# Altium PCB PCB1.PcbDoc
Units mm, origin at the board's own origin, x right, y up, seen from the top; angles counter-clockwise.
Board outline 20 x 20 mm, 2 copper layers (Top Layer, Bottom Layer); 37 components, 35 nets, 141 pads, 32 vias.
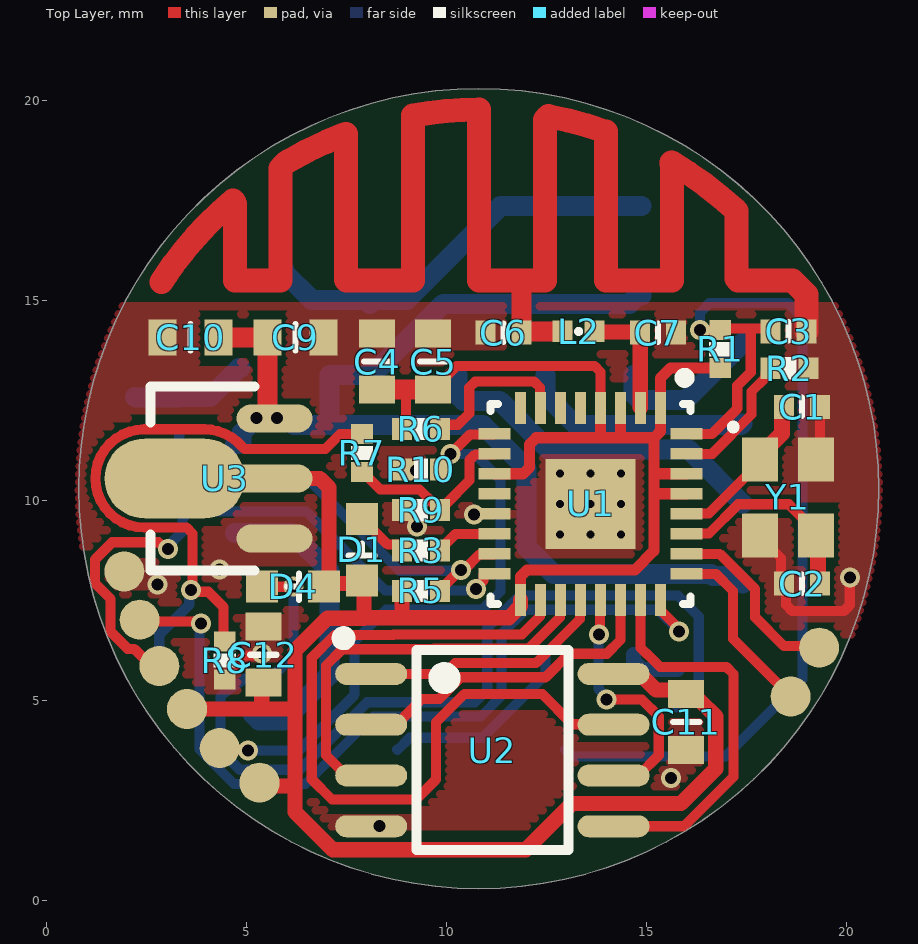
[diagram p0: Top Layer view]
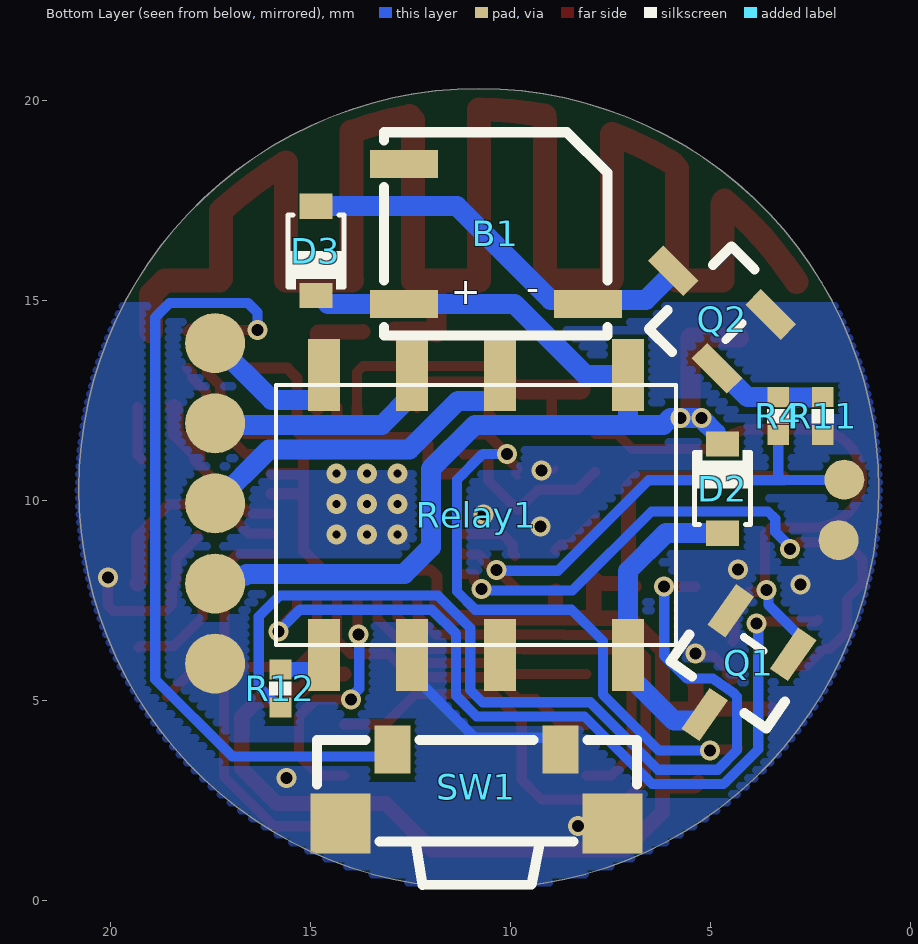
[diagram p1: Bottom Layer view, seen from below]
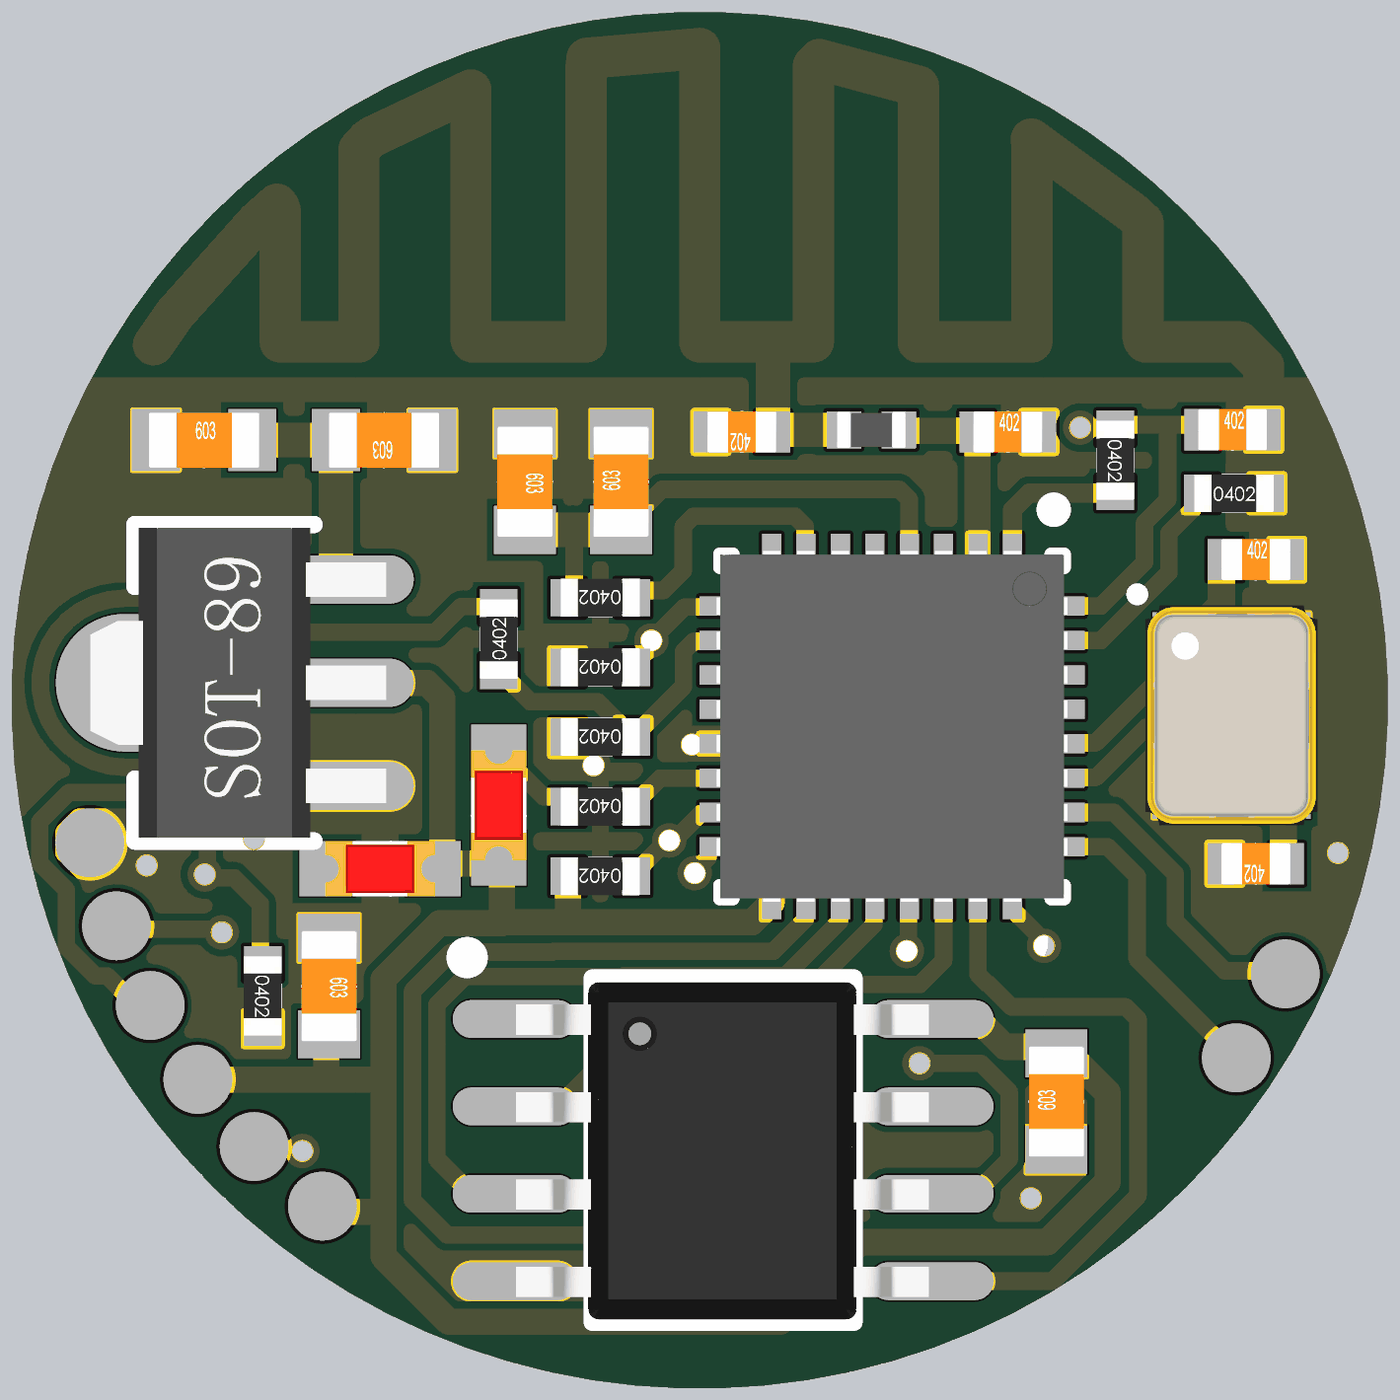
[diagram p2: 3D render of the assembled board from above, using the file's embedded part models]
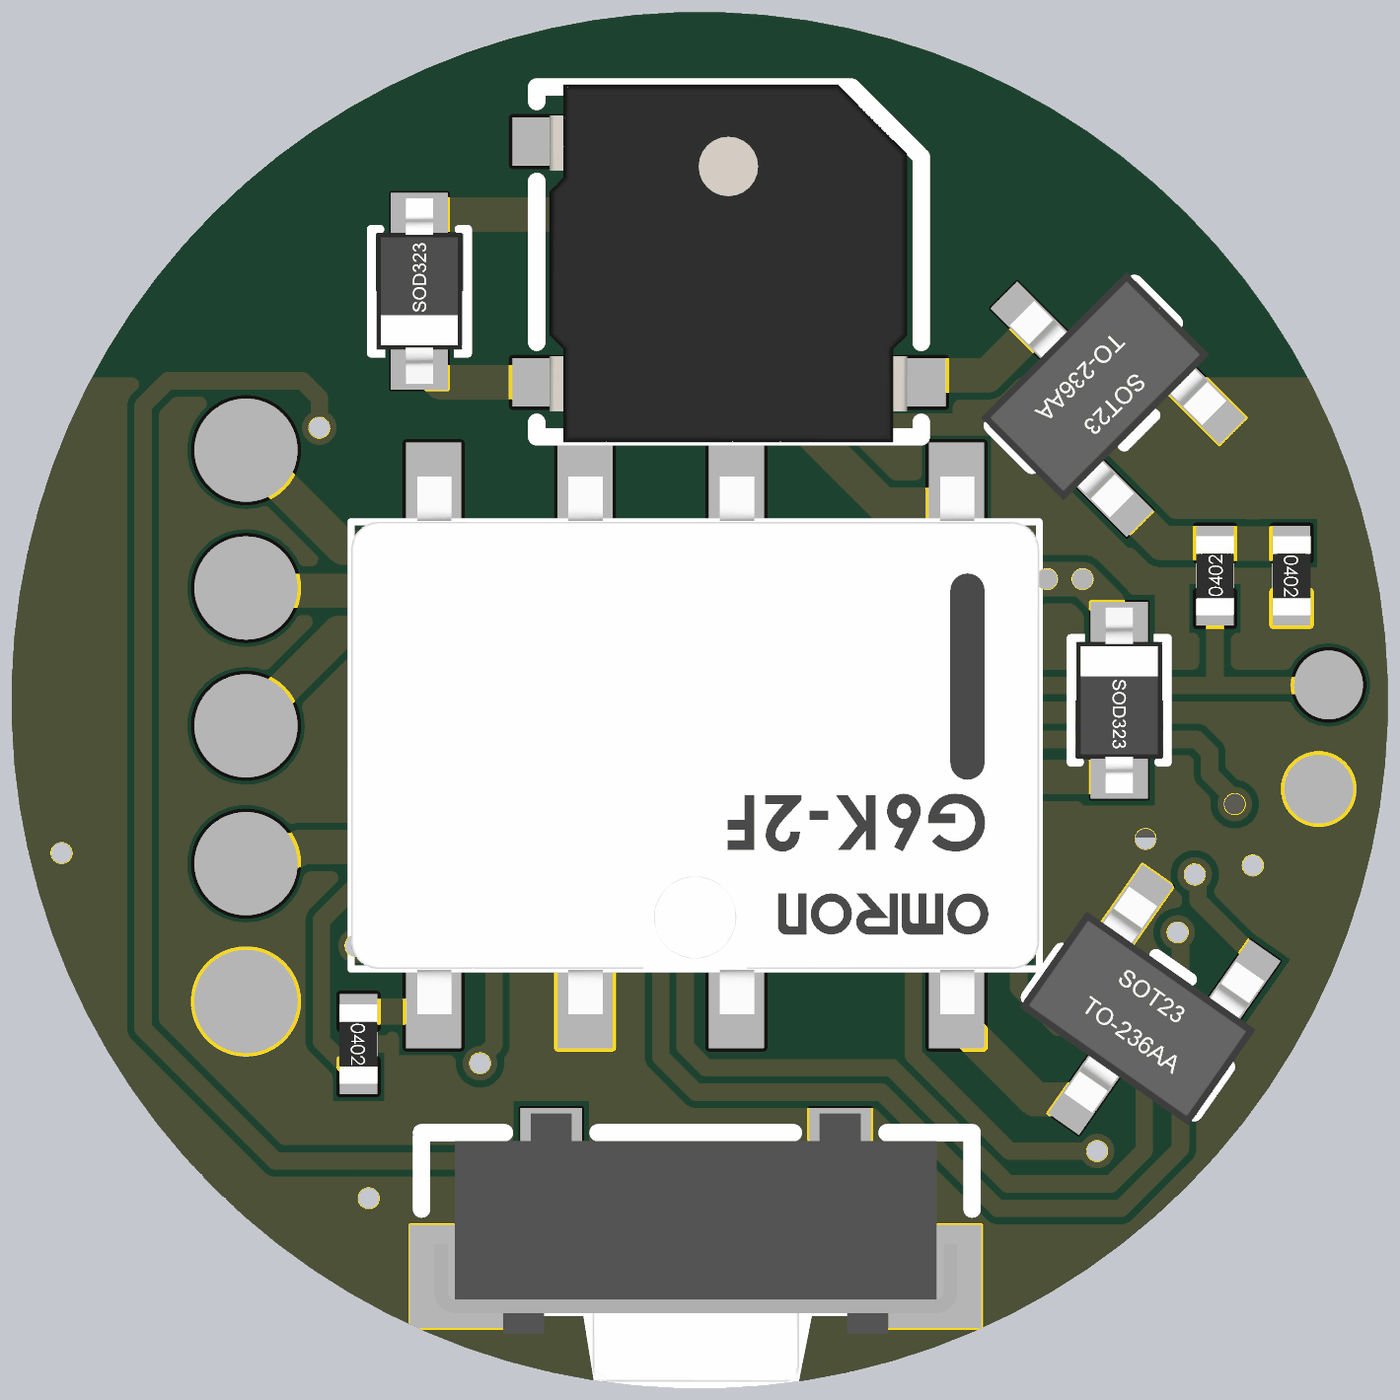
[diagram p3: 3D render of the assembled board from below, using the file's embedded part models]

## Layer stack, top to bottom
Top Solder: solder mask 0.0102, Solder Resist, Dk 3.5
Top Layer: signal copper 0.0356
Dielectric 1: dielectric 0.32, FR-4, Dk 4.8
Bottom Layer: signal copper 0.0356
Bottom Solder: solder mask 0.0102, Solder Resist, Dk 3.5

## Board outline
0.795,10.287 ccw(c10.795,10.287) 10.795,0.287 ccw(c10.795,10.287) 20.795,10.287 ccw(c10.795,10.287) 10.795,20.287 ccw(c10.795,10.287)

## Design rules (kind name [scope] priority, off if disabled: settings)
Clearance [All] p1: gap=0.102 ignorepadtopadclearanceinfootprint=TRUE
ComponentClearance [All] p1: gap=0 collisioncheckmode=3 verticalgap=0 showdistances=FALSE
HoleToHoleClearance [All] p1: gap=0.025 allowstackedmicrovias=TRUE
MinimumSolderMaskSliver [All] p1: minsoldermaskwidth=0.025
PlaneConnect [All] p1: planeconnectstyle=Direct reliefexpansion=0.508 reliefentries=4 reliefconductorwidth=0.254 reliefairgap=0.254
PolygonConnect [All] p1: connectstyle=Direct reliefconductorwidth=0.254 reliefentries=4 polygonreliefangle="90 Angle" airgapwidth=0.254
RoutingVias [All] p1: holewidth=0.711 width=1.27 viastyle="Through Hole" minholewidth=0.711 minwidth=1.27 maxholewidth=0.711 maxwidth=1.27
ShortCircuit [InNet('No Net')] p1: allowed=FALSE
SilkToSilkClearance [All] p1: silktosilkclearance=0.025
SilkToSolderMaskClearance [IsPad] p1: minsilkscreentomaskgap=0.025 clearancetoexposedcopper=TRUE
SolderMaskExpansion [All] p1: expansion=0.025 istentingtop=FALSE
UnConnectedPin [All] p1:
UnRoutedNet [All] p1: checkbadconnections=TRUE
UnpouredPolygon [All] p1: allowunpoured=TRUE
Width [All] p1: maxlimit=1.27 minlimit=0.102 preferedwidth=0.152
21 further rules are at their usual default settings.

## Components (designator, comment, footprint, x,y, rotation, side; value= is the part's Value field where it differs from the comment)
B1 "BEEP" BUZZER-5020 10.369,16.657 r180 bottom
C1 "10pF" 0402C 18.876,12.33 r0 top
C2 "10pF" 0402C 18.876,7.91 r180 top
C3 "1uF" 0402C 18.538,14.217 r0 top
C4 "10uF" 0603C 8.255,13.462 r270 top
C5 "100nF" 0603C 9.652,13.462 r90 top
C6 "2.4pF" 0402C 11.408,14.186 r180 top
C7 "3.0pF" 0402C 15.272,14.186 r0 top
C9 "10uF" 0603C 6.208,14.067 r180 top
C10 "10uF" 0603C 3.592,14.067 r0 top
C11 "10uF" 0603C 15.979,4.455 r90 top
C12 "10uF" 0603C 5.408,6.133 r270 top
D1 "LED" 0603LED 7.874,8.763 r90 top
D2 "DIODE" DIODE-SOD-323 4.699,10.287 r90 bottom
D3 "DIODE" DIODE-SOD-323 14.868,16.231 r270 bottom
D4 "LED" 0603LED 6.151,7.839 r180 top
L2 "2.2nH" 0402L 13.29,14.216 r180 top
Q1 "NPN" SOT-23-3 4.433,5.663 r125 bottom
Q2 "NPN" SOT-23-3 5.05,14.851 r225 bottom
R1 "12K" 0402R 16.834,13.773 r270 top
R2 "12K" 0402R 18.56,13.295 r0 top
R3 "470Ω" 0402R 9.349,8.741 r180 top
R4 "470Ω" 0402R 3.307,12.096 r90 bottom
R5 "12K" 0402R 9.349,7.729 r180 top
R6 "12K" 0402R 9.349,11.778 r180 top
R7 "470Ω" 0402R 7.874,11.176 r90 top
R8 "12KΩ" 0402R 4.444,5.991 r270 top
R9 "12K" 0402R 9.349,9.753 r180 top
R10 "12K" 0402R 9.349,10.766 r180 top
R11 "12KΩ" 0402R 2.194,12.096 r270 bottom
R12 "470Ω" 0402R 15.755,5.291 r270 bottom
Relay1 "G6K-2F-Y-DC5V" RELAY-G6K-2F-Y 10.913,9.661 r0 bottom
SW1 "SWITCH_4P_SIDE_PRESS" SWITCH_SMD_2P_SIDE_PRESS 10.853,2.837 r0 bottom
U1 "ESP8266EX" QFN-32-ESP8266EX 13.589,9.906 r270 top
U2 "W25Q32" SOIC-8 11.095,3.55 r0 top
U3 "AMS1117" SOT-89-3 5.688,10.541 r0 top
Y1 "26MHz" SMD-3225-4PIN 18.403,9.946 r90 top

## Footprints (in the part's own frame and the unit in brackets; to place one, negate y for a bottom-side part, rotate by r counter-clockwise, add the part's x,y. Pads: shape width x height; smd on the part's side, far side on the other; paste and mask are expansions set on the pad)
0402C [mm]
  rect 0.5x0.6 smd mask+0.051: 1(-0.45,0) 2(0.45,0)
  silkscreen extent 0,-0.23 0,0.23, body extent -0.5,-0.3 0.5,0.3, height 0.2
0402L [mm] "贴片电感"
  rect 0.5x0.54 smd mask+0.051: 1(0.4,0) 2(-0.4,0)
  silkscreen extent -0.04,-0.04 0.04,0.04, body extent -0.52,-0.26 0.53,0.26, height 0.36
0402R [mm] "0402贴片电阻"
  rect 0.5x0.544 smd mask+0.051: 1(-0.475,0) 2(0.475,0)
  silkscreen extent -0.18,-0.28 0.18,0.28, body extent -0.57,-0.27 0.58,0.28, height 0.41
0603C [mm]
  rect 0.7x0.9 smd: 1(-0.7,0) 2(0.7,0)
  silkscreen extent 0,-0.33 0,0.33, body extent -0.8,-0.4 0.8,0.4, height 0.3
0603LED [mm]
  rect 0.8x0.8 smd: 1(-0.77,0) 2(0.77,0)
  silkscreen extent -0.15,-0.33 0.15,0.33, body extent -0.8,-0.4 0.8,0.4, height 0.6
BUZZER-5020 [mm] "贴片5020蜂鸣器"
  rect 1.699x0.701 smd mask+0.051: 1(-2.3,-1.75) 2(2.3,-1.75) 3(-2.3,1.75)
  silkscreen extent -2.8,-2.54 2.79,2.54, body extent -2.61,-2.62 2.59,2.58, height 2.1
DIODE-SOD-323 [mm] "SOD-323(0805) Package"
  rect 0.63x0.83 smd: 1(-1.115,0) 2(1.115,0)
  silkscreen extent -0.9,-0.7 0.96,0.7, body extent -1.35,-0.62 1.35,0.63, height 1.1
QFN-32-ESP8266EX [mm] "PQFN, 32-Leads, Body 5.00x5.00mm, Pitch 0.50mm, Thermal Pad 3.00x3.00mm, IPC Medium Density"
  rect 0.8x0.28 smd mask+0.051: 1(-2.4,1.75) 2(-2.4,1.25) 3(-2.4,0.75) 4(-2.4,0.25) 5(-2.4,-0.25) 6(-2.4,-0.75) 7(-2.4,-1.25) 8(-2.4,-1.75) 17(2.4,-1.75) 18(2.4,-1.25) 19(2.4,-0.75) 20(2.4,-0.25) 21(2.4,0.25) 22(2.4,0.75) 23(2.4,1.25) 24(2.4,1.75)
  rect 0.28x0.8 smd mask+0.051: 9(-1.75,-2.4) 10(-1.25,-2.4) 11(-0.75,-2.4) 12(-0.25,-2.4) 13(0.25,-2.4) 14(0.75,-2.4) 15(1.25,-2.4) 16(1.75,-2.4) 25(1.75,2.4) 26(1.25,2.4) 27(0.75,2.4) 28(0.25,2.4) 29(-0.25,2.4) 30(-0.75,2.4) 31(-1.25,2.4) 32(-1.75,2.4)
  rect 2.25x2.25 smd: 33(0,0)
  silkscreen extent -3.27,-2.5 2.5,2.5, body extent -2.55,-2.55 2.55,2.55, height 0.85
RELAY-G6K-2F-Y [mm] "欧娒龙超小型信号继电器"
  rect 0.8x1.8 smd mask+0.05: 1(-3.85,-3.47) 2(-0.65,-3.47) 3(1.55,-3.47) 4(3.75,-3.47) 5(3.75,3.53) 6(1.55,3.53) 7(-0.65,3.53) 8(-3.85,3.53)
  silkscreen extent -5.05,-3.22 4.95,3.28, body extent -5.05,-3.88 4.95,3.94, height 5.2
SMD-3225-4PIN [mm]
  rect 1.1x0.9 smd: 1(1.07,0.58) 2(-0.83,0.58) 3(-0.83,-0.82) 4(1.07,-0.82)
  silkscreen extent 1.87,1.24 1.89,1.26, body extent -1.48,-1.37 1.72,1.13, height 0.61
SOIC-8 [mm]
  oval 1.8x0.55 smd: 1(-2.99,2.105) 2(-2.99,0.835) 3(-2.99,-0.435) 4(-2.99,-1.705) 5(3.07,-1.705) 6(3.07,-0.435) 7(3.07,0.835) 8(3.07,2.105)
  silkscreen extent -3.83,-2.3 1.94,3.15, body extent -2.97,-2.26 3.03,2.64, height 1.7
SOT-23-3 [mm]
  rect 1.25x0.55 smd: 1(1.25,-0.95) 2(1.25,0.95) 3(-1.25,0)
  silkscreen extent -0.65,-1.46 0.9,1.46, body extent -1.5,-1.5 1.5,1.5, height 1.3
SOT-89-3 [mm]
  oval 1.9x0.7 smd: 1(0,-1.5) 3(0,1.5)
  oval 3.5x2 smd: 2(-2.5,0)
  oval 2.1x0.7 smd: 2(-0.1,0)
  silkscreen extent -3.1,-2.3 -0.5,2.3, body extent -3.75,-2.25 0.55,2.25, height 1.51
SWITCH_SMD_2P_SIDE_PRESS [mm] "侧按两脚轻触开关"
  rect 0.9x1.2 smd: 1(-2.1,-0.925) 2(2.1,-0.925)
  rect 1.5x1.5 smd: 3(-3.4,0.925) 4(3.4,0.925)
  silkscreen extent -4.02,-1.16 3.98,2.46, body extent -3.8,-1.44 3.8,2.46, height 3.5

## Part data
B1: "蜂鸣器", BOM名称=蜂鸣器, 学习资源=www.ooocke.com, 版权归属=源创客
C1 C2 C6 C7: library part CAP, "贴片电容", Package=0402, SuppliersPartNumber=C1559, ComponentLink1Description=供应商链接, ComponentLink1URL=http://www.szlcsc.com/product/details_1911.html, Supplier=LC
C3 C5: library part "0402 100nF (104) 10% 16V", "贴片电容", Package=0402, SuppliersPartNumber=C1525, ComponentLink1Description=供应商链接, ComponentLink1URL=http://www.szlcsc.com/product/details_1877.html, Supplier=LC
C4 C9 C10 C11 C12: library part "0603 100nF (104) 10% 50V", "贴片电容", Package=0603, SuppliersPartNumber=C14663, ComponentLink1Description=供应商链接, ComponentLink1URL=http://www.szlcsc.com/product/details_15331.html, Supplier=LC
D1 D4: "发光二极管", Package=0603, SuppliersPartNumber=C72043, ComponentLink1Description=供应商链接, ComponentLink1URL=http://www.szlcsc.com/product/details_73152.html, Supplier=LC
D2 D3: "二极管", Package=SMA(DO-214AC), SuppliersPartNumber=C95872, ComponentLink1Description=供应商链接, ComponentLink1URL=http://www.szlcsc.com/product/details_2841.html, Notepad="1N4007 4007 编号C2464 已经停售, 使用新物料编号C95872", Supplier=LC
L2: library part INDUCTOR, "电感", Package=0603, SuppliersPartNumber=C12100, ComponentLink1Description=供应商链接, ComponentLink1URL=http://www.szlcsc.com/product/details_12685.html, Supplier=LC
Q1 Q2: "三极管", Package=SOT-23, SuppliersPartNumber=C2150, ComponentLink1Description=供应商链接, ComponentLink1URL=http://www.szlcsc.com/product/details_2507.html, Supplier=LC
R1 R2 R3 R4 R5 R6 R7 R8 R9 R10 R11 R12: library part "0402 1.2KΩ (1201) 1%", "贴片电阻", Package=0402, SuppliersPartNumber=C25862, ComponentLink1Description=供应商链接, ComponentLink1URL=http://www.szlcsc.com/product/details_26605.html, Supplier=LC
Relay1: "欧娒龙超小型信号继电器"
SW1: "侧边轻触按键"
U1: "WiFi芯片"
U2: "SPI Flash"
U3: "LDO降压芯片"
Y1: library part CRYSTAL, "贴片晶振", Package=SMD-3225_4P, SuppliersPartNumber=C9002, ComponentLink1Description=供应商链接, ComponentLink1URL=http://www.szlcsc.com/product/details_9522.html, Supplier=LC

## Free pads (board coordinates)
  round 1 smd far side mask+0.05: 2(1.657,10.51) 2(1.8,8.996)
  round 1 smd mask+0.05: 2(1.932,8.216) 2(2.809,5.851) 2(3.501,4.777) 2(4.319,3.801) 2(5.312,2.936) 2(19.304,6.312) 3(2.318,7.009) 3(18.592,5.091)
  round 1.5 smd far side mask+0.05: 4(17.389,5.91) 4(17.389,7.912) 4(17.389,9.915) 4(17.389,11.918) 4(17.389,13.921)

## Via types
v1: diameter 0.5, hole 0.3, Top Layer to Bottom Layer, tented both sides, 23 vias
v2: diameter 0.5, hole 0.2, Top Layer to Bottom Layer, tented both sides, 9 vias

## Nets (pads, with @x,y where several pads share a name; then routed paths per layer and width w, separated by ;. In a path a pad name is that pad's centre, name@x,y a point inside that pad or via, vN(x,y) a via of type N, cw(c..) or ccw(c..) an arc to the next point about the centre after c; other vN are vias at no path point)
+5V: B1.1 C9.2 C10.2 D2.2 D3.2 pad.4@17.389,7.912 Relay1.1 U3.3 | length 29.2
  Top Layer w0.5: C10.2 C9.2 5.508,12.133 5.594,12.047 v1(5.748,12.047)
  Bottom Layer w0.5: D2.2 4.799,11.402 4.864,11.467 4.864,11.679 v1(5.232,12.047) v1(5.748,12.047) 6.007,12.047 6.175,11.879 7.062,11.879 ; D3.2 14.768,15.116 14.56,14.907 9.908,14.907 8.131,13.131 Relay1.1 7.062,11.879 ; pad.4@17.389,7.912 17.198,8.104 16.648,8.104 16.597,8.155 12.657,8.155 11.994,8.819 11.994,10.781 10.895,11.879 7.062,11.879
COM: pad.4@17.389,11.918 Relay1.3 | length 5.8
  Bottom Layer w0.5: Relay1.3 12.462,12.631 13.214,11.879 17.351,11.879 pad.4@17.389,11.918
EN: R6.1 U1.7 | length 3.9
  Top Layer w0.254: R6.1 9.928,11.882 10.272,11.882 10.556,12.165 10.556,12.813 10.704,12.962 12.177,12.962 12.326,12.813 12.326,12.319 U1.7
GND: C1.2 C2.2 C3.2 C4.1 C5.2 C6.2 C7.2 C9.1 C10.1 C11.1 C12.1 pad.2@1.8,8.996 pad.2@1.932,8.216 pad.4@17.389,5.91 Q1.2 Q2.2 R2.2 R8.2 R9.2 R10.2 R11.2 Relay1.6 SW1.1 SW1.3 SW1.4 U1.13 U1.33 U2.4 U3.1 Y1.2 Y1.4 | length 15.2
  Top Layer w0.152: R10.2@8.874,10.788 8.918,10.744 v1(9.222,10.744)
  Top Layer w0.254: R8.2 4.466,5.516 4.589,5.639 4.589,5.76 4.942,6.113 5.331,6.113 v1(5.378,6.16) ; Y1.2 17.823,9.078 18.35,8.551 18.35,7.987 18.473,7.864 18.473,7.488 18.473,7.383 18.622,7.234 19.711,7.225 19.921,7.225 20.07,7.373 v1(20.07,8.067) ; Y1.4 19.326,11.119 C1.2
  Top Layer w0.6: 17.272,15.494 18.637,15.494 18.988,15.143 C3.2
  Bottom Layer w0.254: SW1.1 8.761,3.754 9.065,4.058 10.889,4.058 12.462,5.631 Relay1.6
  other v1: 8.313,1.851 15.606,3.05 2.758,7.886 4.316,8.271 9.252,9.341 10.68,9.643
  other v2: 12.827,9.144 13.589,9.144 14.351,9.144 12.827,9.906 13.589,9.906 14.351,9.906 12.827,10.668 13.589,10.668 14.351,10.668
GPIO0: pad.2@1.657,10.51 R4.1 R5.1 U1.15 | length 12.5
  Top Layer w0.254: R5.1@9.883,7.81 10.323,8.249 v1(10.352,8.249) ; v1@10.308,8.235 10.405,8.235 10.813,8.643 11.176,8.643 U1.15@11.197,8.664
  Bottom Layer w0.254: pad.2@1.657,10.51 2.193,10.501 3.307,10.501 ; R4.1@3.307,11.615 3.307,10.501 ; v1(10.352,8.249) 10.338,8.235 8.813,8.235 6.547,10.501 3.307,10.501
GPIO2: R3.1 U1.14 | length 1.7
  Top Layer w0.254: R3.1@9.889,8.609 9.947,8.667 9.947,8.886 10.217,9.156 U1.14
GPIO4: pad.2@2.809,5.851 U1.16 | length 15.5
  Top Layer w0.254: pad.2@2.809,5.851 2.607,5.851 2.178,6.28 2.017,6.28 1.59,6.707 1.59,7.528 1.204,7.914 1.204,8.518 1.63,8.945 2.787,8.945 2.954,8.778 v1(3.02,8.778) ; v1(10.722,7.775) 10.722,7.803 10.916,7.998 10.916,8.143 10.929,8.156 U1.16
  Bottom Layer w0.254: v1(3.02,8.778) 3.02,8.844 3.385,9.209 3.385,9.536 3.565,9.716 6.478,9.716 8.455,7.738 10.685,7.738 v1(10.722,7.775)
GPIO5: pad.3@2.318,7.009 U1.24 | length 21
  Top Layer w0.254: pad.3@2.318,7.009 2.367,6.961 3.803,6.961 v1(3.85,6.913) ; U1.24 15.339,7.246 15.751,6.834 15.751,6.765 v1(15.798,6.718)
  Bottom Layer w0.254: v1(3.85,6.913) 3.81,6.874 3.81,3.766 4.675,2.902 6.463,2.902 8.152,4.591 10.849,4.591 11.362,5.105 11.362,6.654 11.968,7.26 15.267,7.26 15.798,6.729 v1(15.798,6.718)
GPIO12: R7.1 R9.1 U1.10 | length 4.6
  Top Layer w0.254: R7.1 7.896,10.701 8.332,10.265 9.312,10.265 9.679,9.898 9.701,9.898 R9.1@9.824,9.775 ; R9.1 R9.1@9.824,9.775 ; U1.10 11.176,11.143 10.709,11.143 10.56,10.994 10.56,10.49 9.969,9.898 9.947,9.898 R9.1@9.824,9.775
GPIO13: U1.12
GPIO14: pad.2@4.319,3.801 R10.1 U1.9 | length 15.7
  Top Layer w0.152: R10.1@9.824,10.579 R10.1@9.917,10.672
  Top Layer w0.254: pad.2@4.319,3.801 4.351,3.769 4.988,3.769 v1(5.02,3.736) ; R10.1 9.824,10.788 10.045,11.009 10.045,11.108 v1(10.092,11.155) 10.58,11.643 11.176,11.643 U1.9
  Bottom Layer w0.254: v1(5.02,3.736) 6.291,3.736 7.691,5.136 7.691,6.475 8.476,7.26 10.883,7.26 11.339,7.715 11.339,10.51 10.694,11.155 v1(10.092,11.155)
NC: pad.4@17.389,9.915 Relay1.2 | length 8.8
  Bottom Layer w0.5: Relay1.2 10.262,12.631 10.413,12.481 11.315,12.481 12.527,11.27 16.035,11.27 pad.4@17.389,9.915
NetANT1_2: C6.1 L2.1 | length 12.3
  Top Layer w0.254: 11.62,15.494 11.626,15.489
  Top Layer w0.5: C6.1 C6.1@11.858,14.216 ; 11.858,15.494 C6.1@11.858,14.216 ; L2.1 C6.1@11.858,14.216
  Top Layer w0.6: 10.795,19.758 10.795,15.494 11.62,15.494 11.858,15.494 12.446,15.494 12.446,19.505
NetB1_2: B1.2 D3.1 Q2.3 | length 10.3
  Bottom Layer w0.5: Q2.3 5.912,15.713 6.617,15.008 7.969,15.008 B1.2 8.17,15.008 9.002,15.008 11.34,17.346 D3.1
NetC1_1: C1.1 U1.28 Y1.1 | length 4
  Top Layer w0.254: U1.28 16.001,9.668 16.548,9.668 17.474,10.593 17.5,10.593 17.823,10.916 Y1.1
  Top Layer w0.4: Y1.1 17.823,11.116 18.376,11.669 18.376,12.28 C1.1
NetC2_1: C2.1 U1.27 Y1.3 | length 5.2
  Top Layer w0.254: U1.27 15.999,9.166 16.55,9.166 17.279,9.895 18.545,9.895 19.223,9.216 Y1.3 Y1.3@19.272,9.068
  Top Layer w0.4: Y1.3 19.276,9.064 19.276,7.96 C2.1
NetC7_1: C7.1 L2.2 U1.2 | length 3
  Top Layer w0.381: L2.2 13.705,14.201 14.807,14.201 C7.1 14.83,14.178 14.83,12.315 U1.2
NetD1_2: D1.2 R3.2 | length 1.3
  Top Layer w0.254: D1.2 8.521,8.886 8.751,8.886 8.874,8.763 R3.2
NetD2_1: D2.1 Q1.3 Relay1.8 | length 7.8
  Bottom Layer w0.5: D2.1 6.119,9.172 7.064,8.227 7.064,7.783 7.062,7.781 Relay1.8 7.062,5.631 5.92,4.488 5.301,4.488 Q1.3
NetD4_2: D4.2 R12.2 | length 23.7
  Top Layer w0.254: D4.2 5.386,7.834 v1(6.16,7.834)
  Bottom Layer w0.254: v1(6.16,7.834) 6.16,6.112 5.585,5.537 4.945,5.537 4.419,5.169 4.338,5.088 4.338,3.742 4.822,3.258 6.315,3.258 8.005,4.947 10.702,4.947 11.007,5.252 11.007,6.802 11.821,7.615 15.768,7.615 16.294,7.089 16.294,5.334 15.777,4.816 R12.2
NetQ1_1: Q1.1 R7.2 R8.1 | length 16.1
  Top Layer w0.254: v1(3.602,7.755) 3.639,7.791 3.639,9.164 3.49,9.312 2.438,9.312 cw(c2.438,10.541) 2.438,11.77 3.938,11.77 cw(c3.938,10.541) 4.856,11.358 4.861,11.353 4.935,11.278 6.96,11.278 7.333,11.651 R7.2 ; v1@3.642,7.733 3.667,7.708 4.031,7.708 4.409,7.33 4.409,6.501 R8.1
  Bottom Layer w0.254: Q1.1 2.805,6.275 2.805,6.632 3.555,7.382 3.555,7.708 v1(3.602,7.755)
NetQ2_1: Q2.1 R4.2 R11.1 | length 2.9
  Bottom Layer w0.5: R11.1 2.216,12.571 2.222,12.565 R4.2@3.329,12.565 ; R4.2@3.329,12.571 4.078,12.571 4.803,13.296 Q2.1
NetR2_1: R2.1 U1.31 | length 3.4
  Top Layer w0.254: U1.31 16.631,11.156 17.613,12.139 17.613,12.714 17.962,13.062 17.962,13.172 R2.1
NetR12_1: R12.1 Relay1.5 | length 1.3
  Bottom Layer w0.381: Relay1.5 14.663,5.976 14.872,5.766 R12.1
NetU1_18: U1.18 U2.7 | length 19.6
  Top Layer w0.254: U1.18 12.326,7.493 12.326,7.097 11.868,6.639 8.671,6.639 8.659,6.628 7.186,6.628 6.62,6.062 6.62,3.021 7.125,2.516 9.229,2.516 9.723,3.011 9.723,4.439 10.434,5.151 12.38,5.151 13.133,4.398 14.152,4.398 U2.7
NetU1_19: U1.19 U2.3 | length 10.4
  Top Layer w0.254: U2.3 7.48,3.115 6.976,3.618 6.976,5.863 7.385,6.272 9.671,6.272 9.682,6.283 12.038,6.283 12.826,7.071 12.826,7.493 U1.19
NetU1_20: U1.20 U2.1 | length 6.3
  Top Layer w0.254: U2.1 9.932,5.655 10.205,5.927 12.228,5.927 13.326,7.026 13.326,7.493 U1.20
NetU1_21: U1.21 U2.6 | length 6.4
  Top Layer w0.254: v1(13.805,6.643) 13.826,6.665 13.826,7.493 U1.21 ; v1(13.988,5.011) 14.875,5.011 15.293,4.593 15.293,3.618 14.79,3.115 U2.6
  Bottom Layer w0.254: v1(13.805,6.643) 13.785,6.624 13.785,5.281 13.988,5.078 v1(13.988,5.011)
NetU1_22: U1.22 U2.2 | length 8.1
  Top Layer w0.254: U2.2 8.73,4.385 9.371,5.027 9.807,5.027 10.352,5.572 12.466,5.572 13.052,6.158 13.996,6.158 14.339,6.501 U1.22
NetU1_23: U1.23 U2.5 | length 9.9
  Top Layer w0.254: U2.5 15.923,1.845 17.163,3.085 17.163,5.651 16.983,5.831 15.325,5.831 14.998,6.158 14.988,6.158 14.839,6.307 U1.23
NO: pad.4@17.389,13.921 Relay1.4 | length 3.9
  Bottom Layer w0.5: Relay1.4 14.663,12.655 14.813,12.505 15.973,12.505 pad.4@17.389,13.921
RES: C3.1 R1.1 SW1.2 U1.32 | length 24.6
  Top Layer w0.254: U1.32 16.628,11.656 17.258,12.286 17.258,12.861 17.594,13.197 17.594,14.292 ; v1(16.323,14.248) R1.1 16.878,14.292 17.594,14.292 ; C3.1 18.013,14.292 17.594,14.292
  Bottom Layer w0.254: SW1.2 13.122,3.593 16.962,3.593 18.884,5.516 18.884,14.567 18.521,14.93 16.57,14.93 16.323,14.683 v1(16.323,14.248)
URXD: pad.3@18.592,5.091 U1.25 | length 4.6
  Top Layer w0.254: U1.25 16.72,8.156 17.151,7.726 17.151,6.532 pad.3@18.592,5.091
UTXD: pad.2@19.304,6.312 U1.26 | length 4.7
  Top Layer w0.254: U1.26 16.817,8.656 17.704,7.769 17.704,7.072 18.423,6.354 19.262,6.354 pad.2@19.304,6.312
VDD3V3: C4.2 C5.1 C11.2 C12.2 D1.1 D4.1 pad.2@3.501,4.777 pad.2@5.312,2.936 R1.2 R5.2 R6.2 U1.1 U1.3 U1.4 U1.11 U1.17 U1.29 U1.30 U2.8 U3.2 | length 65.4
  Top Layer w0.254: R6.2@8.971,11.897 8.971,12.762 ; C5.1 9.752,12.762 9.975,12.985 9.975,13.085 10.242,13.352 13.69,13.352 13.839,13.203 U1.4
  Top Layer w0.279: U1.11 11.901,10.656 12.065,10.82 12.065,11.393 12.229,11.557 13.843,11.557 ; U1.17 11.839,8.091 12.003,8.255 14.695,8.255 15.175,8.735 15.175,10.16 ; U1.4@13.839,12.306 13.839,11.561 13.843,11.557 ; U1.3 14.339,11.614 14.396,11.557 ; U1.29 15.179,10.156 15.175,10.16 ; U1.30 15.187,10.656 15.175,10.668 ; R1.2 15.584,13.298 15.339,13.053 U1.1 15.339,11.721 15.175,11.557 ; 13.843,11.557 14.396,11.557 ; 14.396,11.557 15.175,11.557 ; 15.175,10.16 15.175,10.668 ; 15.175,10.668 15.175,11.557
  Top Layer w0.381: U3.2@3.188,10.541 5.588,10.541 5.589,10.54 6.828,10.54 7.051,10.317 D4.1@7.051,7.995 ; pad.2@3.501,4.777 5.37,4.777 ; pad.2@5.312,2.936 5.394,2.854 6.201,2.854 ; C12.2 5.37,5.395 5.37,4.777 ; D4.1 7.051,7.969 D4.1@7.051,7.995 ; D1.1 7.797,7.916 7.13,7.916 D4.1@7.051,7.995 ; D1.1@7.923,7.944 7.923,7.047 ; R5.2 8.878,7.724 8.878,7.058 ; U1.17 11.839,7.347 11.55,7.058 8.878,7.058 ; U2.8 14.824,5.655 15.228,5.251 15.884,5.251 16.139,4.996 16.312,4.996 16.721,4.587 16.721,3.284 15.849,2.412 13.122,2.412 11.967,1.256 7.148,1.256 6.201,2.203 6.201,2.854 ; 5.37,4.777 6.195,4.777 6.201,4.783 ; 6.201,2.854 6.201,4.783 ; 6.201,4.783 6.201,6.236 7.012,7.047 7.923,7.047 ; 7.923,7.047 7.935,7.058 8.878,7.058
  Top Layer w0.5: C4.2 8.971,12.762 C5.1@9.752,12.762
pads on no net: B1.3 Relay1.7 U1.5 U1.6 U1.8
copper on no net: | length 35.3
  Top Layer w0.6: 2.857,15.453 cw(c10.795,10.287) 3.164,15.897 cw(c10.795,10.287) 4.651,17.495 cw(c4.534,17.378) 4.699,17.378 4.699,15.494 5.842,15.494 5.842,18.288 cw(c6.346,17.962) 6.044,18.48 cw(c10.795,10.287) 7.469,19.155 7.469,15.551 ccw(c7.55,15.551) 7.493,15.494 9.144,15.494 9.144,19.495 cw(c9.744,19.495) 9.156,19.616 cw(c10.795,10.287) 10.795,19.758 ; 12.446,19.505 cw(c12.923,19.142) 12.533,19.598 cw(c10.795,10.287) 13.973,19.209 13.973,15.497 13.97,15.494 15.621,15.494 15.621,18.362 ccw(c15.021,18.344) 15.613,18.441 cw(c10.795,10.287) 17.235,17.232 17.235,15.583 ccw(c17.361,15.583) 17.272,15.494

## Polygon pours and split planes (outlines as drawn)
GND on Top Layer "GND_L01_P000" (hatched Horizontal grid 0.2 track 0.203, remove dead copper, pour order 0): 0.795,10.287 ccw(c10.795,10.287) 10.795,0.287 ccw(c10.795,10.287) 20.795,10.287 ccw(c10.795,10.287) 10.795,20.287 ccw(c10.795,10.287)
GND on Bottom Layer "GND_L02_P002" (hatched Horizontal grid 0.2 track 0.203, remove dead copper, pour order 2): 0.795,10.287 ccw(c10.795,10.287) 10.795,0.287 ccw(c10.795,10.287) 20.795,10.287 ccw(c10.795,10.287) 10.795,20.287 ccw(c10.795,10.287)

## Other copper
Top Layer:
  pour cut-out: 1.651,14.986 20.066,14.986 20.066,21.082 1.651,21.082
Bottom Layer:
  pour cut-out: 1.651,14.986 20.066,14.986 20.066,21.082 1.651,21.082

## Silkscreen, mask and mechanical layers (free items; w line width, h text height)
Mechanical 1:
  circle w0.254: c10.795,10.287 r10
  circle w0.254: c10.795,10.287 r10

## Text inside footprints (layer, text, board x,y; h text height)
B1: Bottom Overlay "+" at 11.496,15.47 h0.65 r180; Bottom Overlay "-" at 9.608,15.48 h0.65 r180